# Altium PCB nguon12pcb.PcbDoc
Units mil, origin at the board's own origin, x right, y up, seen from the top; angles counter-clockwise.
Board outline 6000 x 4000 mil, 2 copper layers (Top Layer, Bottom Layer); 10 components, 34 nets, 21 pads, 0 vias.
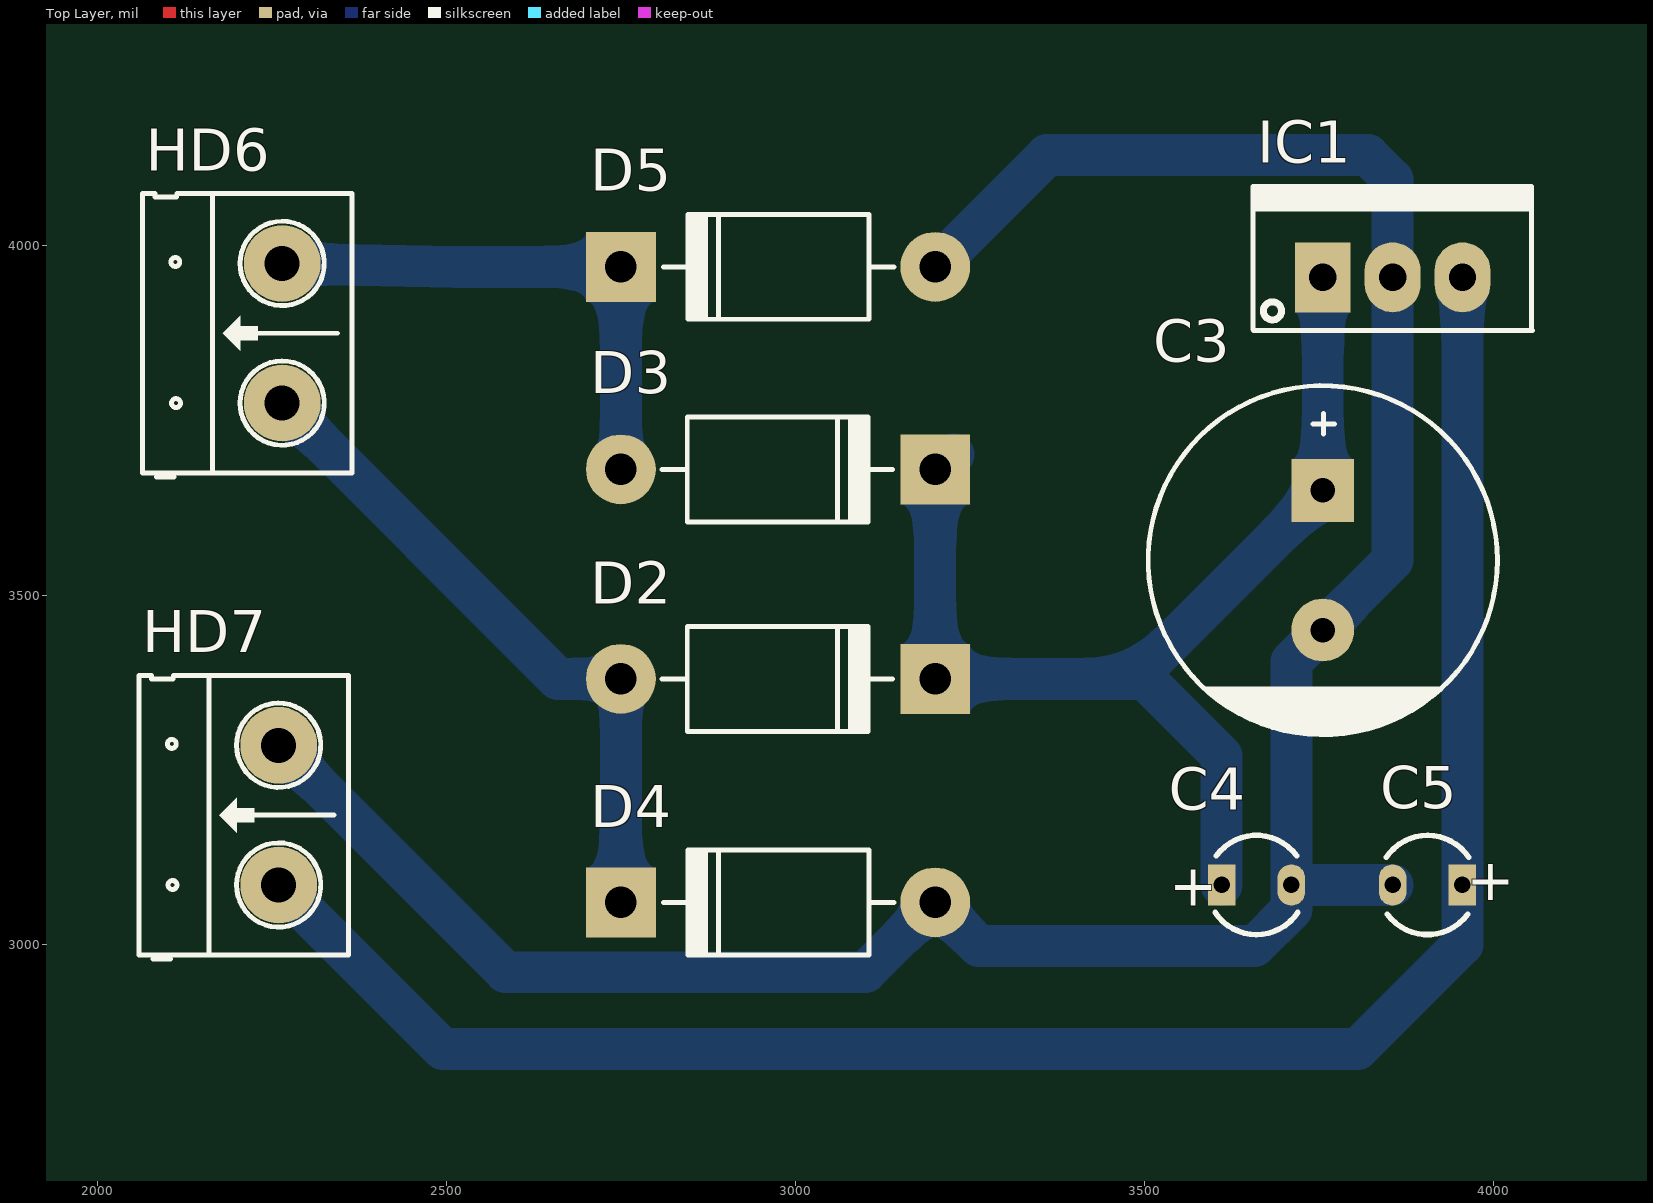
[diagram p0: Top Layer view]
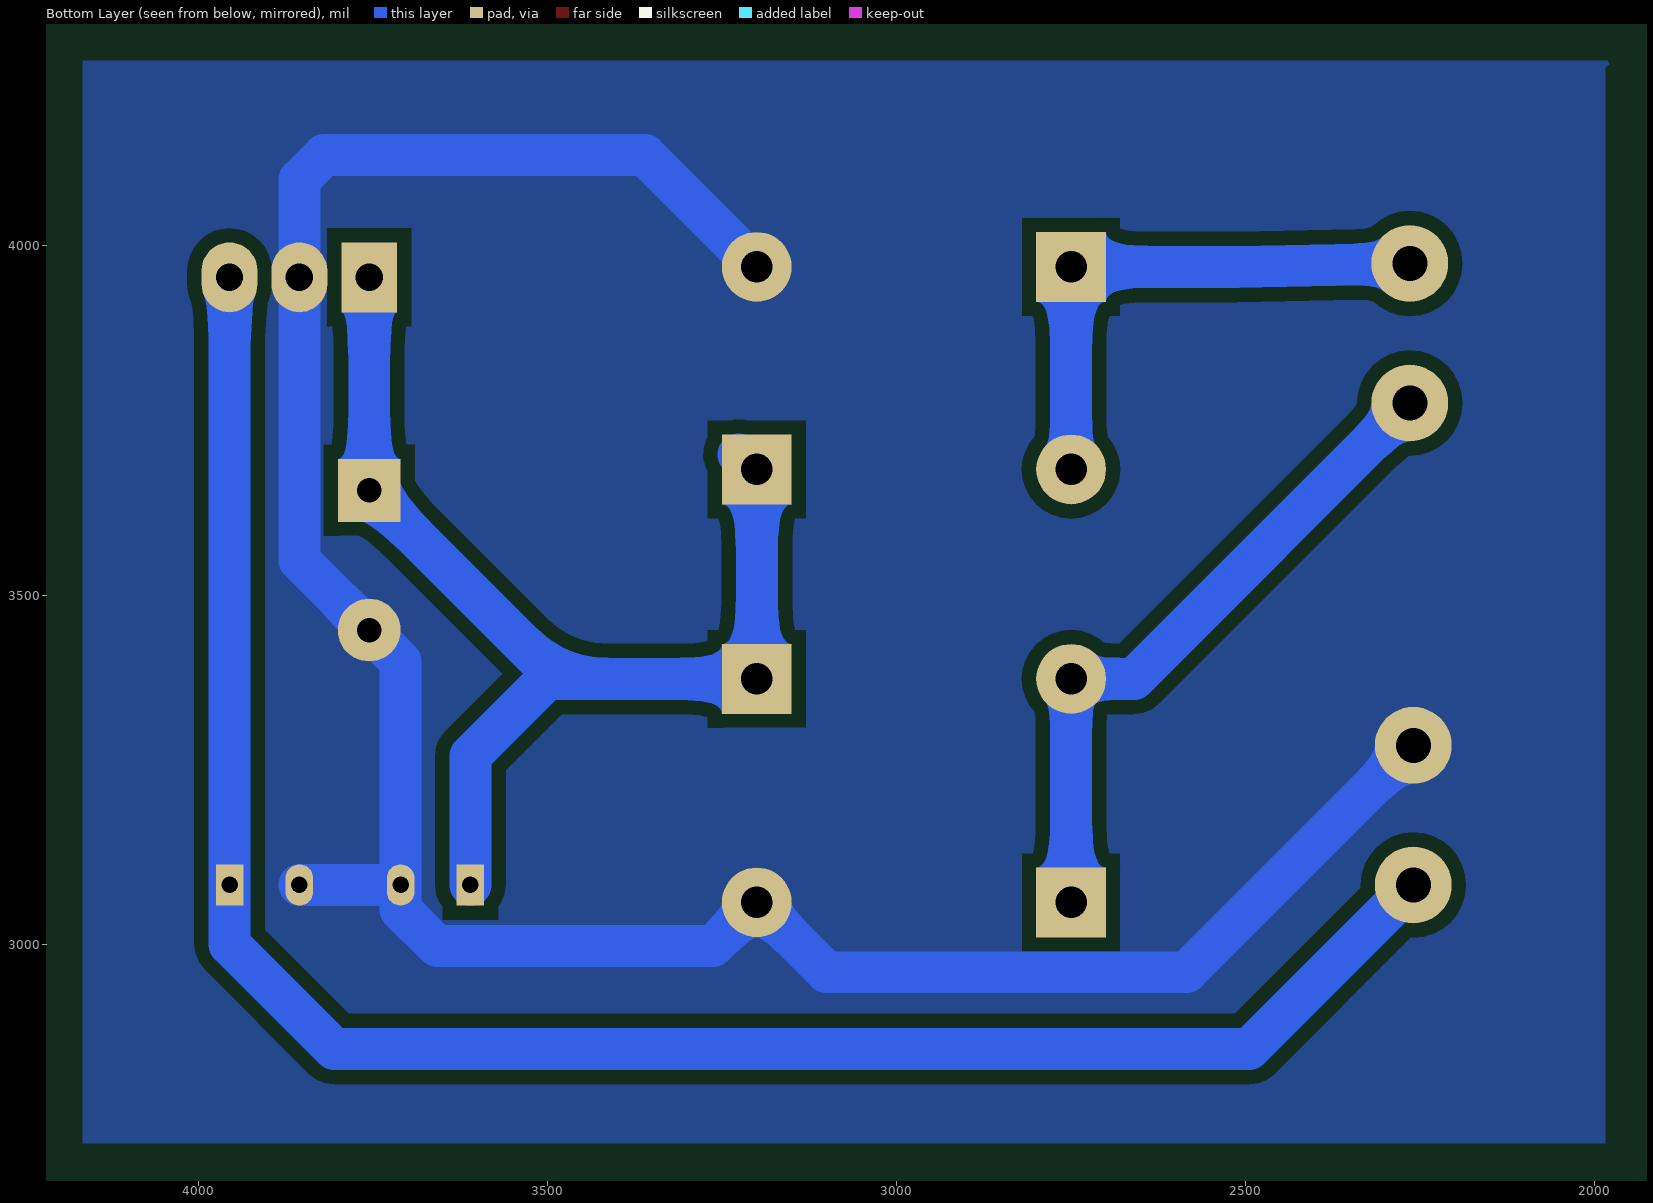
[diagram p1: Bottom Layer view, seen from below]
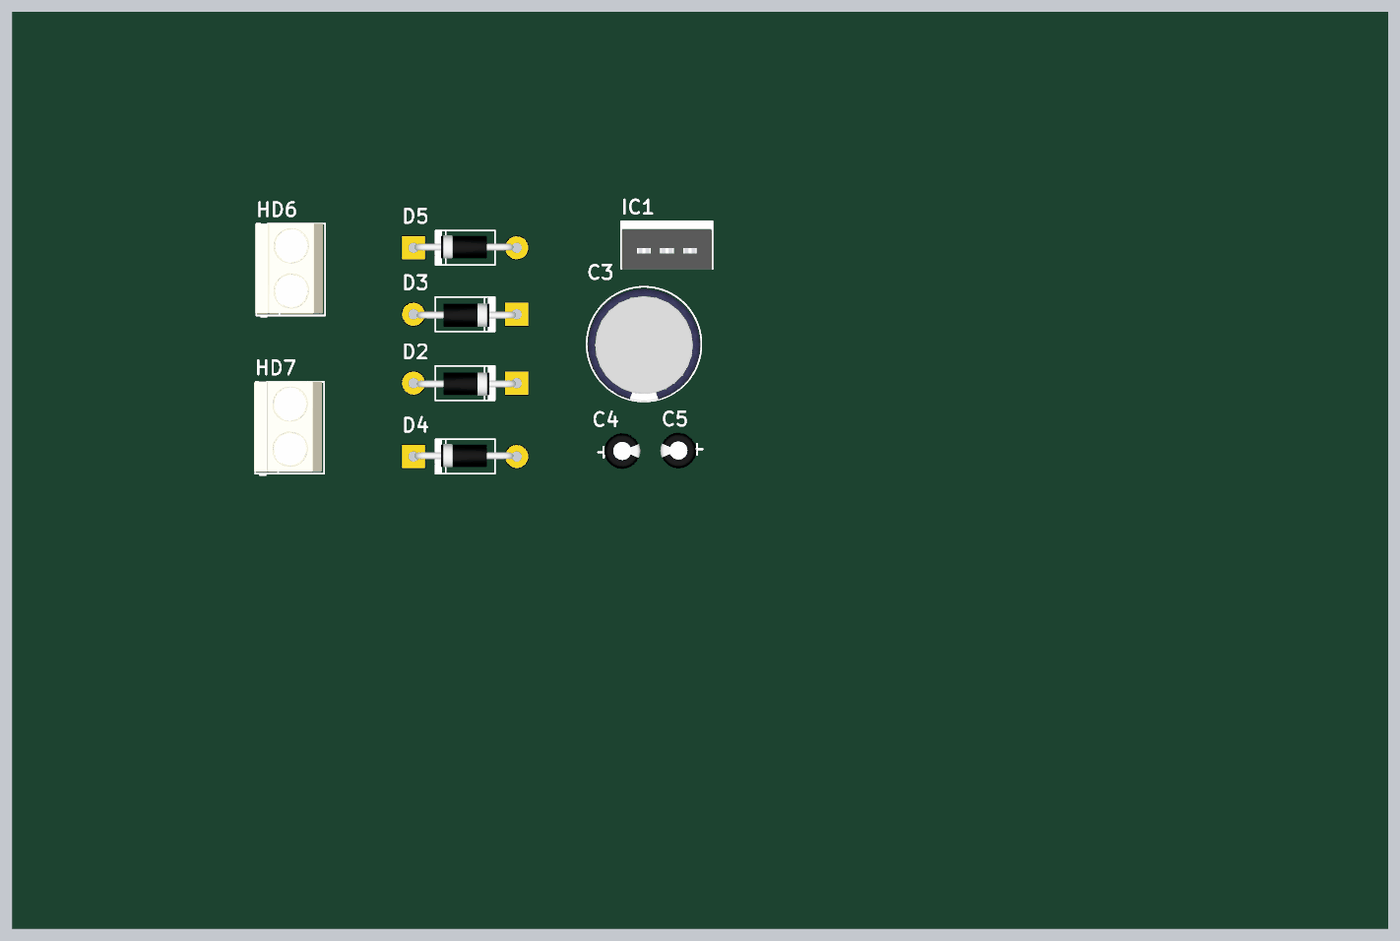
[diagram p2: 3D render of the assembled board from above, using the file's embedded part models]

## Layer stack, top to bottom
Top Solder: solder mask 0.4, Solder Resist, Dk 3.5
Top Layer: signal copper 1.4
Dielectric 1: dielectric 12.6, FR-4, Dk 4.8
Bottom Layer: signal copper 1.4
Bottom Solder: solder mask 0.4, Solder Resist, Dk 3.5

## Board outline
1000,1000 7000,1000 7000,5000 1000,5000

## Design rules (kind name [scope] priority, off if disabled: settings)
Clearance [All] p1: gap=20 ignorepadtopadclearanceinfootprint=FALSE
PolygonConnect [All] p1: connectstyle=Direct reliefconductorwidth=10 reliefentries=4 polygonreliefangle="90 Angle" airgapwidth=10
RoutingLayers [All] p1: top layer_v5=FALSE bottom layer_v5=TRUE
RoutingVias [All] p1: holewidth=28 width=50 viastyle="Through Hole" minholewidth=28 minwidth=50 maxholewidth=28 maxwidth=50
SolderMaskExpansion [All] p1: expansion=4 istentingtop=FALSE
UnRoutedNet [All] p1: checkbadconnections=TRUE
Width [All] p1: maxlimit=60 minlimit=60 preferedwidth=60
28 further rules are at their usual default settings.

## Components (designator, comment, footprint, x,y, rotation, side; value= is the part's Value field where it differs from the comment)
C3 "Cap Pol3" CP2/5 3755,3650 r270 top value=C?
C4 "Cap Pol 3mm" C3MM 3660,3085 r0 top
C5 "Cap Pol 3mm" C3MM 3905,3085 r180 top
D2 "1N4007" D2A 3200,3380 r180 top
D3 "1N4007" D2A 3200,3680 r180 top
D4 "1N4007" D2A 2750,3060 r0 top
D5 "1N4007" D2A 2750,3970 r0 top
HD6 "Input 12VAC" HED2 2265,3775 r90 top value="Header 2"
HD7 "Input 12VDC" HED2 2260,3085 r90 top value="Header 2"
IC1 "LM78xx" TO220-123 3755,3955 r0 top

## Footprints (in the part's own frame and the unit in brackets; to place one, negate y for a bottom-side part, rotate by r counter-clockwise, add the part's x,y. Pads: shape width x height; smd on the part's side, far side on the other; paste and mask are expansions set on the pad)
C3MM [mm]
  rect 1x1.5 hole 0.6: 1(-1.27,0)
  oval 1x1.5 hole 0.6: 2(1.27,0)
  silkscreen extent -1.5,-1.81 1.5,1.8, body extent -2,-2.03 1.99,1.97, height 7.01
CP2/5 [mil] "Tu hoa 1000uF/25V,50V"
  rect 90x90 hole 35: 1(0,0)
  round 90 hole 35: 2(200,0)
  silkscreen extent -150,-250 350,250, body extent -142,-246 350,246, height 984
D2A [mil] "Diode 2A, W 150mil, L 450mil"
  round 100 hole 45: 1(450,0)
  rect 100x100 hole 45: 2(0,0)
  silkscreen extent 61,-75 391,75, body extent 5,-47 435,54, height 100
HED2 [mil] "Header 2, 2 pin, hight 300mil, Pin to Pin 200, Colour Green"
  round 110 hole 50: 1(0,0) 2(200,0)
  silkscreen extent -106,-100 300,200, body extent -92,-90 302,205, height 394
TO220-123 [mil] "TO-220 - 1-2-3"
  rect 80x100 hole 39: 1(0,0)
  oval 80x100 hole 39: 2(100,0) 3(200,0)
  silkscreen extent -100,-76 300,130, body extent -95,-80 295,97, height 323

## Part data
C3: "Polarized Capacitor (Surface Mount)", LatestRevisionDate=17-Jul-2002, LatestRevisionNote="Re-released for DXP Platform.", PackageReference=C0805, Publisher="Altium Limited"
C4 C5: "Polarized Capacitor (Axial)", LatestRevisionDate=17-Jul-2002, LatestRevisionNote="Re-released for DXP Platform.", PackageReference=POLAR0.8, Published=8-Jun-2000, Publisher="Altium Limited"
D2 D3 D4 D5: library part D1A, "Diode 1A"
HD6 HD7: library part Hed2, "Header 2 (Green)"
IC1: "Positive Voltage Regulator", ComponentLink1Description="Manufacturer Link", ComponentLink1URL=http://www.st.com/, ComponentLink2Description=Datasheet, ComponentLink2URL=http://www.st.com/stonline/products/literature/ds/2146/l78m05c.pdf, DatasheetVersion=Apr-1994, LatestRevisionDate=17-Jul-2002, LatestRevisionNote="Re-released for DXP Platform.", Note="Tab is connected to pin 3 (GND).", PackageDescription="TO, Thru-Hole, Vertical, Heatsink Mounted; 3 In-Line Leads; Pitch 2.54 mm; Pin sequence 1, 3, 2", PackageReference=ISOWATT220AB, PackageVersion=Jul-1998, Published=24-Aug-2001, Publisher="Altium Limited"

## Nets (pads, with @x,y where several pads share a name; then routed paths per layer and width w, separated by ;. In a path a pad name is that pad's centre, name@x,y a point inside that pad or via, vN(x,y) a via of type N, cw(c..) or ccw(c..) an arc to the next point about the centre after c; other vN are vias at no path point)
+5: 
+12: 
GND: C3.2 C4.2 C5.2 D4.1 D5.1 HD7.2 IC1.2 | length 3659.5
  Bottom Layer w60: HD7.2 2585,2960 3100,2960 D4.1 3262.58,2997.42 3657.42,2997.42 3710,3050 C4.2 ; D5.1 3360,4130 3819.85,4130 3855,4094.85 3855,3550 C3.2 3710,3405 C4.2 ; C5.2 C4.2
NetC1_1: 
NetC2_1: 
NetC3_1: C3.1 C4.1 D2.2 D3.2 IC1.1 | length 1661.3
  Bottom Layer w60: D3.2@3226.15,3701.51 3206.96,3685.72 D3.2 D2.2 3485,3380 ; C4.1 3610,3270 3500,3380 3485,3380 ; IC1.1 C3.1 3485,3380
NetC5_1: C5.1 HD7.1 IC1.3 | length 2809.5
  Bottom Layer w60: HD7.1 2495,2850 3805,2850 3955,3000 C5.1 IC1.3
NetD1_2: 
NetD2_1: D2.1 D4.2 HD6.1 | length 968.6
  Bottom Layer w60: HD6.1 2660,3380 D2.1 D4.2
NetD3_1: D3.1 D5.2 HD6.2 | length 775.1
  Bottom Layer w60: HD6.2 2513,3970 D5.2 D3.1
NetDIO1_1: 
NetDIO2_1: 
NetHD2_1: 
NetHD2_2: 
NetHD3_1: 
NetHD3_2: 
NetJP4_1: 
NetJP4_2: 
NetP1_1: 
NetP1_2: 
NetP1_3: 
NetP2_1: 
NetP2_2: 
NetP2_3: 
NetR2_1: 
NetR5_1: 
NetR8_2: 
NetR9_2: 
NetR10_2: 
NetR11_2: 
NetR14_2: 
NetR15_2: 
NetU1_4: 
NetU1_8: 

## Polygon pours and split planes (outlines as drawn)
GND on Bottom Layer "GND_L02_P000" (solid, pour order 0): 4165,4265 4165,2715 1985,2715 1985,4255 1975,4265

## Text inside footprints (layer, text, board x,y; h text height)
C4: Top Overlay "+" at 3535,3055 h60
C5: Top Overlay "+" at 4030,3115 h60 r180